# Altium PCB PCB1.PcbDoc (part 2 of 2)
Units mil, origin at the board's own origin, x right, y up, seen from the top; angles counter-clockwise.
Board outline 6000 x 4000 mil, 2 copper layers (Top Layer, Bottom Layer); 74 components, 70 nets, 267 pads, 158 vias.
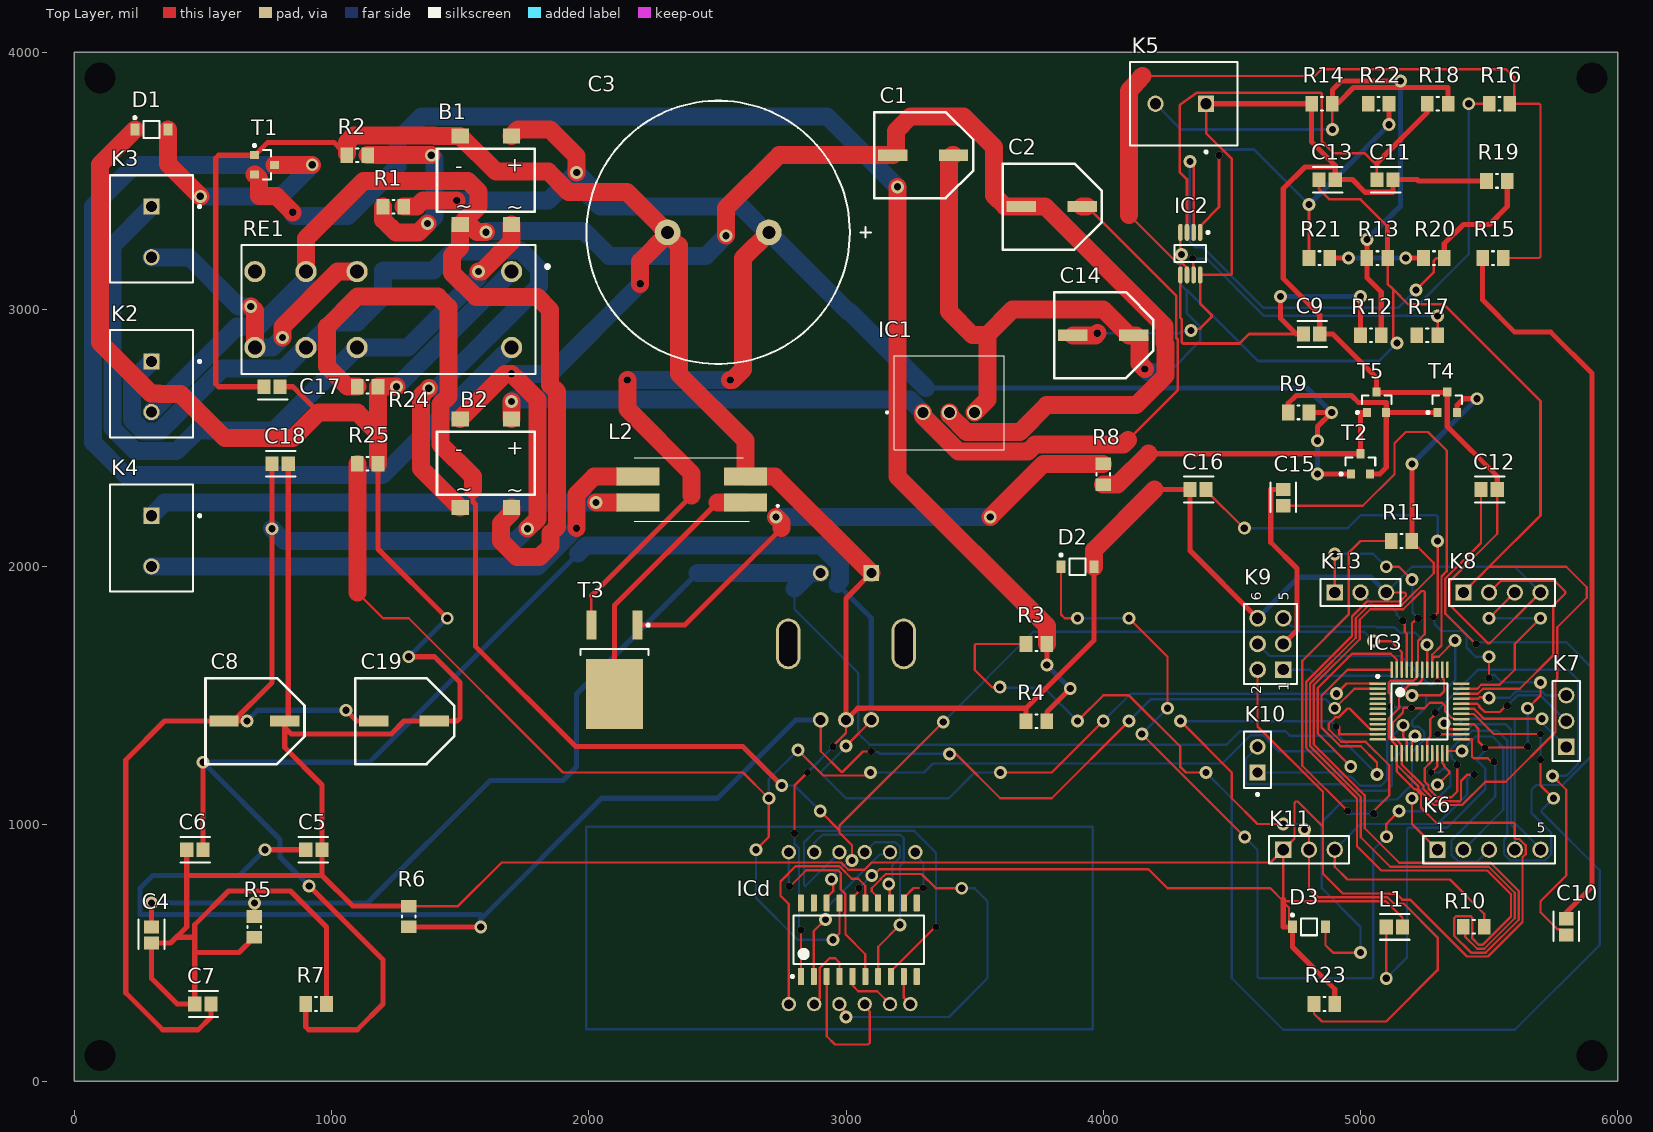
[diagram p0: Top Layer view]

## Via types
v1: diameter 50, hole 28, Top Layer to Bottom Layer, 116 vias
v2: diameter 28, hole 28, Top Layer to Bottom Layer, 42 vias

## Nets (pads, with @x,y where several pads share a name; then routed paths per layer and width w, separated by ;. In a path a pad name is that pad's centre, name@x,y a point inside that pad or via, vN(x,y) a via of type N, cw(c..) or ccw(c..) an arc to the next point about the centre after c; other vN are vias at no path point) (continued)
NetICd_6: (continued)
  Top Layer w9: v2@2777.56,759.44 2781,756 2845.53,820.53 2968.37,820.53 2979.54,809.37 2979.54,745.62 2989.46,735.7 2989.98,735.7 2997.31,728.37 2997.31,657.06 2995.08,654.84 2995.08,647.38 2998,644.46 2998,571 3075,494 ICd.6
  Bottom Layer w9: v2@2777.56,759.44 LD1.7
  other v2: 2779.28,757.72
NetICd_7: ICd.7 LD1.8 | length 982.2
  Top Layer w9: ICd.7 3125,523 v1(3210,608)
  Bottom Layer w9: LD1.8 2876.83,891.4 2876.83,926.83 2908.48,958.48 3211.06,958.48 3224.81,944.73 3224.81,851.81 3210,837 v1(3210,608)
NetICd_8: ICd.8 LD1.9 | length 1481.6
  Top Layer w9: ICd.8 3175,427.95 3347.05,600 v2(3350,600)
  Bottom Layer w9: LD1.9 2841.86,758 2837,762.86 2837,928 2882.48,973.48 3264.52,973.48 3350,888 v2(3350,600)
NetICd_9: ICd.9 LD1.6 | length 117.6
  Top Layer w9: ICd.9 3225,325 LD1.6
NetICd_12: ICd.12 LD1.12 | length 264.4
  Top Layer w9: ICd.12 3225,713.39 3262.58,750.96 v2(3300.14,750.96)
  Bottom Layer w9: LD1.12 3269.69,878.89 3301.08,847.49 3301.08,751.9 v2(3300.14,750.96)
NetICd_13: ICd.13 LD1.10 | length 400.8
  Top Layer w9: v1(3165.95,767.05) 3170.48,762.52 3170.48,697.24 ICd.13
  Bottom Layer w9: LD1.10 3111.39,929.1 3192,929.1 3209.81,911.29 3209.81,869.81 3180,840 3180,787 3165.95,772.95 v1(3165.95,767.05)
NetICd_14: ICd.14 LD1.3 | length 1557.7
  Top Layer w9: LD1.3 2974.41,292.42 3000,266.83 v1(3000,250) ; ICd.14 3125,713.39 3100.13,738.26 3100.13,749.92 3135.5,785.3 3135.5,786.8 3154.2,805.5 3293.83,805.5 3349.33,750 v1(3450,750)
  Bottom Layer w9: v1(3000,250) 3400,250 3550,400 3550,700 3500,750 v1(3450,750)
NetICd_15: ICd.15 LD1.1 | length 942.4
  Top Layer w9: LD1.1 2777.56,688.94 2745.5,721 2745.5,777 2804.03,835.53 2974.59,835.53 3022.74,787.38 3047.26,787.38 3075,759.65 ICd.15
NetK3_2: K3.2 RE1.12 RE1.24 | length 1175.4
  Top Layer w70: v1(686,3012) 702.36,2995.64 RE1.24 ; v1(809,2891) 809,2933.01 1023.63,3147.64 RE1.12
  Bottom Layer w70: K3.2 446.85,3203.15 638,3012 v1(686,3012) ; RE1.24 770.36,2852.36 v1(809,2891)
NetK4_1: K4.1 L2.4 | length 1912.5
  Top Layer w70: v1(2028,2250) L2.4
  Bottom Layer w70: K4.1 351.57,2250 v1(2028,2250)
NetK4_2: K4.2 L2.3 | length 2112.6
  Top Layer w70: v2(1951.86,2149.89) 1952,2149.89 1952,2281.48 2020.52,2350 L2.3
  Bottom Layer w70: K4.2 1801.57,2001.57 1949.89,2149.89 v2(1951.86,2149.89)
NetK5_2: K5.2 R12.2 R13.1 R14.2 R18.2 | length 2764.1
  Top Layer w10: v1(4890.71,3700) R14.2
  Top Layer w20: R14.2 R14.2@4890.71,3806 ; v1(5025,3272) R13.1 5025,3123.71 5080.71,3068 R12.2 ; v1(5156,3888) 4925,3888 4890.71,3853.71 R14.2@4890.71,3806 ; R18.2 5340.71,3863 4973,3863 4916,3806 R14.2@4890.71,3806
  Bottom Layer w10: K5.2 4303.15,3700 v1(4890.71,3700)
  Bottom Layer w20: v1(5025,3272) 5156,3403 v1(5156,3888)
NetL2_1: L2.1 T3.2 | length 1019
  Top Layer w20: T3.2 2100,1850 2500,2250
  Top Layer w70: 2500,2250 L2.1
NetR1_1: R1.1 R2.2 | length 789
  Top Layer w70: R2.2 v1(1388,3600) ; R1.1 1200,3349 1250,3299 1338,3299 v1(1373,3334)
  Bottom Layer w70: v1(1373,3334) 1400,3361 1400,3588 v1(1388,3600)
NetR3_2: R3.2 R4.2 T1.2 | length 5336.2
  Top Layer w20: R4.2 3780.71,1435.71 v1(3872,1527) ; v1(3780.71,1618.29) R3.2
  Top Layer w70: T1.2 701.97,3525.2 717.66,3509.5 717.66,3440.4 786.76,3440.4 v2(849,3378.16) ; v1(3200,3477) 3200,2350 3780.71,1769.29 R3.2
  Bottom Layer w20: v1(3780.71,1618.29) v1(3872,1527)
  Bottom Layer w70: v2(849,3378.16) 849,3371 856,3364 1064,3364 1257,3557 1257,3657 1350,3750 2927,3750 v1(3200,3477)
NetR8_1: R8.1 T2.3 T5.1 | length 1235.6
  Top Layer w20: 4175.37,2439.37 T2.3 5000,2600 T5.1
  Top Layer w70: R8.1 4055.29,2319.29 4175.37,2439.37
NetR8_2: R8.2 T3.1 | length 2126.6
  Top Layer w20: T3.1 2373.23,1773.23 2750,2150
  Top Layer w70: v1(2728.09,2193.91) 2750,2172 2750,2150 ; v1(3561,2194) 3767,2400 R8.2
  Bottom Layer w70: v1(2728.09,2193.91) 2728.19,2194 v1(3561,2194)
NetR9_1: R9.1 T2.2 T4.1 T5.2 | length 966.1
  Top Layer w20: R9.1 4719.29,2635.58 4750,2666.29 4964.71,2666.29 4993,2638 5100,2638 T5.2 ; T2.2 5075,2360.63 5100,2385.63 T5.2 ; T4.1 T5.2
NetR10_2: R10.2 R11.2 T4.2 | length 3410
  Top Layer w9: R11.2 5200,2094.09 5220.11,2073.99 5226.01,2073.99 5285,2015 5285,1975 5160,1850 5032.02,1850 4982.02,1800 4982.02,1724.45 4803.79,1546.21 4803.79,1302.73 5001.5,1105.02 5001.5,948.5 5116,834 5499,834 5600,733 5600,634 5481,515 5454,515 5407.74,561.26 5407.74,592.26 R10.2
  Top Layer w20: R11.2 v1(5200,2400) ; T4.2 5374.8,2627.8 5400,2653 v1(5453,2653)
  Bottom Layer w20: v1(5200,2400) v1(5453,2653)
NetR20_1: R20.1 R21.2 | length 364.3
  Top Layer w20: R21.2 v1(4953,3200) ; v1(5176,3200) R20.1
  Bottom Layer w20: v1(4953,3200) v1(5176,3200)
PA4: C4.2 ENC1.2 IC3.48 R5.1 | length 7076.9
  Top Layer w9: v1(5064,1193) 5064,1238.99 5001.02,1301.97 4921.96,1301.97 4848.79,1375.15 4848.79,1498.99 4949.8,1600 IC3.48
  Top Layer w20: C4.2 v1(300,693) ; R5.1 v1(700,693)
  Bottom Layer w9: 2800,1915 2800,1835 3048,1587 3048,1352 3092,1308 4479.19,1308 4531.59,1360.41 4708.55,1360.41 4725.42,1343.54 4913.46,1343.54 v1(5064,1193)
  Bottom Layer w20: v1(300,693) v1(700,693) 1140,693 1616.61,1169.61 1900,1169.61 1952.39,1222 1952.39,1505.39 2422.59,1975.59
  Bottom Layer w70: 2422.59,1975.59 2860.59,1975.59 ; 2800,1915 2860.59,1975.59 ; ENC1.2 2860.59,1975.59
PA5: C6.2 ENC1.A IC3.1 R7.2 | length 8200.7
  Top Layer w9: v1(3000,1303.15) 3098.43,1401.58 ENC1.A ; v1(3600,1200) 3800,1200 v1(4000,1400) ; v1(4906.72,1506.72) 4945.85,1545.85 IC3.1
  Top Layer w20: C6.2 v1(500,1240) ; R7.2 900,211.72 911.72,200 1100,200 1200,300 1200,472 v1(913,759)
  Bottom Layer w9: v1(3000,1303.15) 3000,1300 2903.73,1203.73 2903.73,1196.27 3000,1100 3400,1100 3500,1200 v1(3600,1200) ; v1(4000,1400) 4106.72,1506.72 v1(4906.72,1506.72)
  Bottom Layer w20: v1(913,759) 800,872 800,940 v1(500,1240) 1147.48,1240 1958.24,2050.76 ; 2966.23,1932.77 3098.43,1800.57 ENC1.A
  Bottom Layer w70: 1958.24,2050.76 1989.48,2082 2902.64,2082 2977.57,2007.07 2977.57,1944.11 2966.23,1932.77
PA6: C5.2 ENC1.B IC3.2 R6.1 | length 6739.9
  Top Layer w9: ENC1.B 2901.57,1282.62 2980.46,1203.73 2987.92,1203.73 3066.14,1281.95 v2(3098.45,1281.95) ; v1(3403,1272.5) 3427.5,1272.5 3600,1100 3800,1100 v1(4100,1400) ; v1(4900,1450) 4900.2,1450 4976.37,1526.16 IC3.2
  Top Layer w20: v1(741.14,900) C5.2 ; R6.1 v1(1580,600)
  Bottom Layer w9: v2(3098.45,1281.95) 3100,1283.5 3103.64,1279.86 3124.64,1279.86 3132,1272.5 v1(3403,1272.5) ; v1(4100,1400) 4185.5,1485.5 4864.5,1485.5 v1(4900,1450)
  Bottom Layer w20: v1(741.14,900) 641.14,800 305,800 255,750 255,648 1580,648 1580,630 ; v1(1580,600) 1580,630 ; ENC1.B 2804.72,1404.72 2500,1100 2050,1100 1580,630
"PC0 (10)": IC3.10 R11.1 | length 2223.5
  Top Layer w9: v2(4950.32,1050.32) 4773.79,1226.85 4773.79,1634.19 4954,1814.4 4954,2054 5000,2100 R11.1 ; v2(5052,1040) 5052,1051 5112,1111 5112,1228 5020.02,1319.98 4925.17,1319.98 4876.4,1368.74 4876.4,1389.33 4901.57,1414.5 4914.7,1414.5 4949.37,1449.16 4956.82,1449.16 5033.09,1372.9 5035.03,1372.9 5039.24,1368.68 IC3.10
  Bottom Layer w9: v2(4950.32,1050.32) 4950,1050 4951,1040 v2(5052,1040)
"PD0 (20)": C10.1 IC3.20 | length 1989
  Top Layer w9: IC3.20 5259.06,1327.29 5271.62,1339.85 5271.62,1407.58 5287.78,1423.73 v2(5290.35,1433.35) ; v1(5746,1187) 5800,1133 5800,800 5700,700 5700,656.67 5765.33,591.34 5770.56,591.34 5772.25,589.66 5778.82,589.66 C10.1
  Bottom Layer w9: v2(5290.35,1433.35) 5457,1600 5807,1600 5846,1561 5846,1233 5800,1187 v1(5746,1187)
"PD1 (21)": C12.1 IC3.21 | length 3498.4
  Top Layer w9: IC3.21 5278.74,1247.29 5274.53,1243.08 5274.53,1241.14 5250,1216.61 5250,1165.35 5264.5,1150.85 5264.5,1137.96 5298.73,1103.73 5353.73,1103.73 5376,1126 5376,1224 v2@5374.9,1236.2 ; v2@5447.4,1700.4 5330,1817.8 5330,1953.87 5468.47,2092.34 C12.1
  Bottom Layer w9: v2@5374.9,1236.2 5354.99,1256.1 5354.99,1266.01 5349.83,1271.17 5349.83,1290.04 5386.32,1326.52 5397.73,1326.52 5434.21,1363 5532,1363 5570,1325 5570,951.91 5558,939.91 5558,882.6 5582.6,858 5717.4,858 5742,882.6 5742,965.91 5665,1042.91 5665,1133.31 5683.19,1151.5 5785.71,1151.5 5900,1265.79 5900,1607 5800,1707 5454,1707 v2@5447.4,1700.4
  other v2: 5375.45,1230.1 5450,1700
"PD2 (22)": D2.1 IC3.22 | length 3740.4
  Top Layer w9: D2.1 3835.63,1814.37 3850,1800 v1(3900,1800) ; v1(4100,1800) 4250,1650 v1(4250,1450) ; v1(4150,1350) v1(4550,950) ; v1(5100.65,950.65) 5100.65,1000.65 v1(5150,1050) ; v2(5274.5,1200) 5298.43,1223.93 IC3.22
  Bottom Layer w9: v1(3900,1800) v1(4100,1800) ; v1(4150,1350) v1(4250,1450) ; v1(4550,950) 4600,900 4600,405.27 4605.27,400 5044.73,400 5050,405.27 5050,900 v1(5100.65,950.65) ; v1(5150,1050) 5250,1050 5350,1150 5350,1194.63 5332,1212.63 5317.77,1212.63 5305.14,1200 v2(5274.5,1200)
"PE0 (30)": IC3.30 R3.1 | length 5276.4
  Top Layer w9: v1(3598,1532) 3568,1532 3500,1600 3500,1694.73 3505.27,1700 R3.1 ; v1(3900,1400) 4000,1500 4100,1500 4300,1300 4300,1221.21 4321.21,1200 v1(4400,1200) ; IC3.30 5440.67,1427.74 5518.41,1350 5699.8,1350 v2@5699.95,1349.85 ; v2@5700,1249.8 5700,1150 v1(5750,1100)
  Bottom Layer w9: v1(3598,1532) 3600,1530 3770,1530 v1(3900,1400) ; v1(4400,1200) 4500,1100 4500,400 4700,200 5600,200 5930,530 5930,820 5703.73,1046.27 5703.73,1053.73 v1(5750,1100) ; v2@5699.95,1349.85 5699.95,1250.05 5700.1,1249.9 v2@5700,1249.8
  other v2: 5700,1250 5700,1350
VIN: B1.1 C3.2 R1.2 R9.2 T2.1 T3.3 | length 7182.4
  Top Layer w9: T3.3 2010.24,1887.24
  Top Layer w20: 2010.24,1887.24 2400,2277 ; R9.2 v1(4888,2600) 4833,2545 v1(4833,2490) ; v1(4833,2360.63) T2.1
  Top Layer w70: R1.2 1331.52,3400 1355.52,3424 v2(1486.52,3424) ; B1.1 1725,3700 1850,3700 1953,3597 v1(1953,3533) ; v2(2150,2726) 2150,2613.5 2400,2363.5 2400,2277 ; v2(2550,2726) 2558.99,2726 2600,2767.01 2600,3200 C3.2
  Bottom Layer w20: 3311.35,2695.35 4792.65,2695.35 v1(4888,2600) ; v1(4833,2360.63) v1(4833,2490)
  Bottom Layer w70: v2(1486.52,3424) 1844,3424 v1(1953,3533) 2003,3483 2003,3441.01 2044.01,3400 2591.88,3400 2691.88,3300 C3.2 3007.23,2992.77 3013.92,2992.77 3311.35,2695.35 ; v2(2150,2726) v2(2550,2726)
pads on no net: ENC1.3 ENC1.4 IC3.3 IC3.4 IC3.5 IC3.6 IC3.7 IC3.8 IC3.9 IC3.12 IC3.13 IC3.18 IC3.19 IC3.36 IC3.37 ICd.10 ICd.11 ICd.19 ICd.20 R17.1 R22.1 RE1.14

## Text inside footprints (layer, text, board x,y; h text height)
B1: Top Overlay "~" at 1480,3375.02 h60; Top Overlay "~" at 1680,3370.02 h60; Top Overlay "-" at 1480,3530.01 h60; Top Overlay "+" at 1680,3535 h60
B2: Top Overlay "+" at 1680,2435 h60; Top Overlay "~" at 1680,2270.02 h60; Top Overlay "-" at 1480,2430.01 h60; Top Overlay "~" at 1480,2275.02 h60
K6: Top Overlay "5" at 5685.04,966.93 h40; Top Overlay "1" at 5295.28,966.93 h40
K9: Top Overlay "6" at 4614.57,1868.11 h40 r90; Top Overlay "5" at 4720.87,1868.11 h40 r90; Top Overlay "2" at 4614.57,1504.33 h40 r90; Top Overlay "1" at 4720.87,1516.14 h40 r90